# Altium PCB PCB.PcbDoc
Units mm, origin at the board's own origin, x right, y up, seen from the top; angles counter-clockwise.
Board outline 159.96 x 128.2 mm, 2 copper layers (Top Layer, Bottom Layer); 269 components, 251 nets, 1194 pads, 0 vias.
Unrouted connection lines stored in the file: 871.
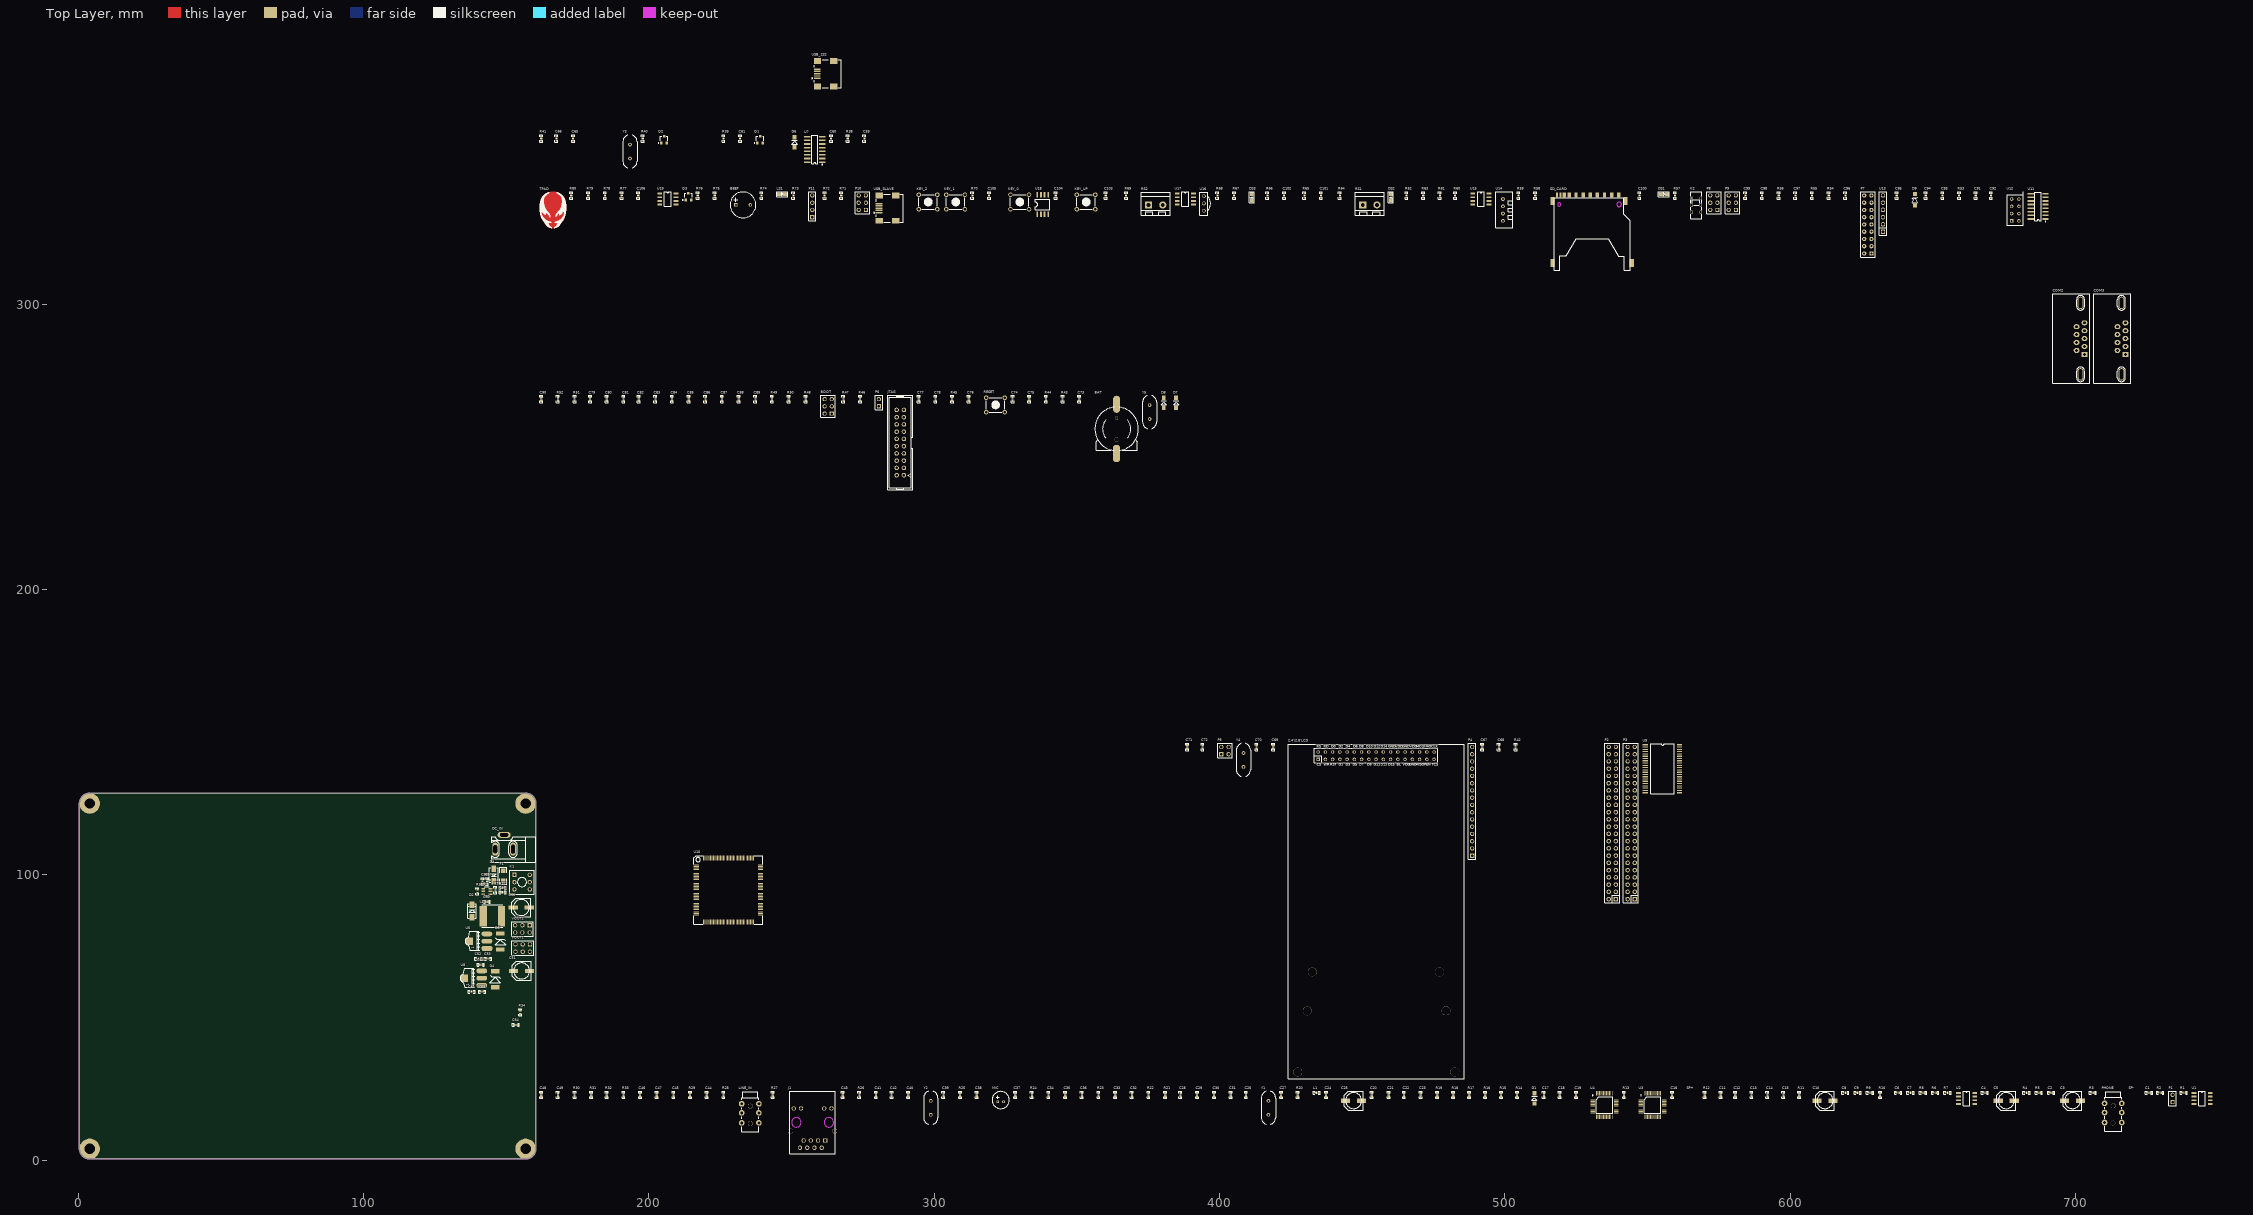
[diagram p0: Top Layer view]
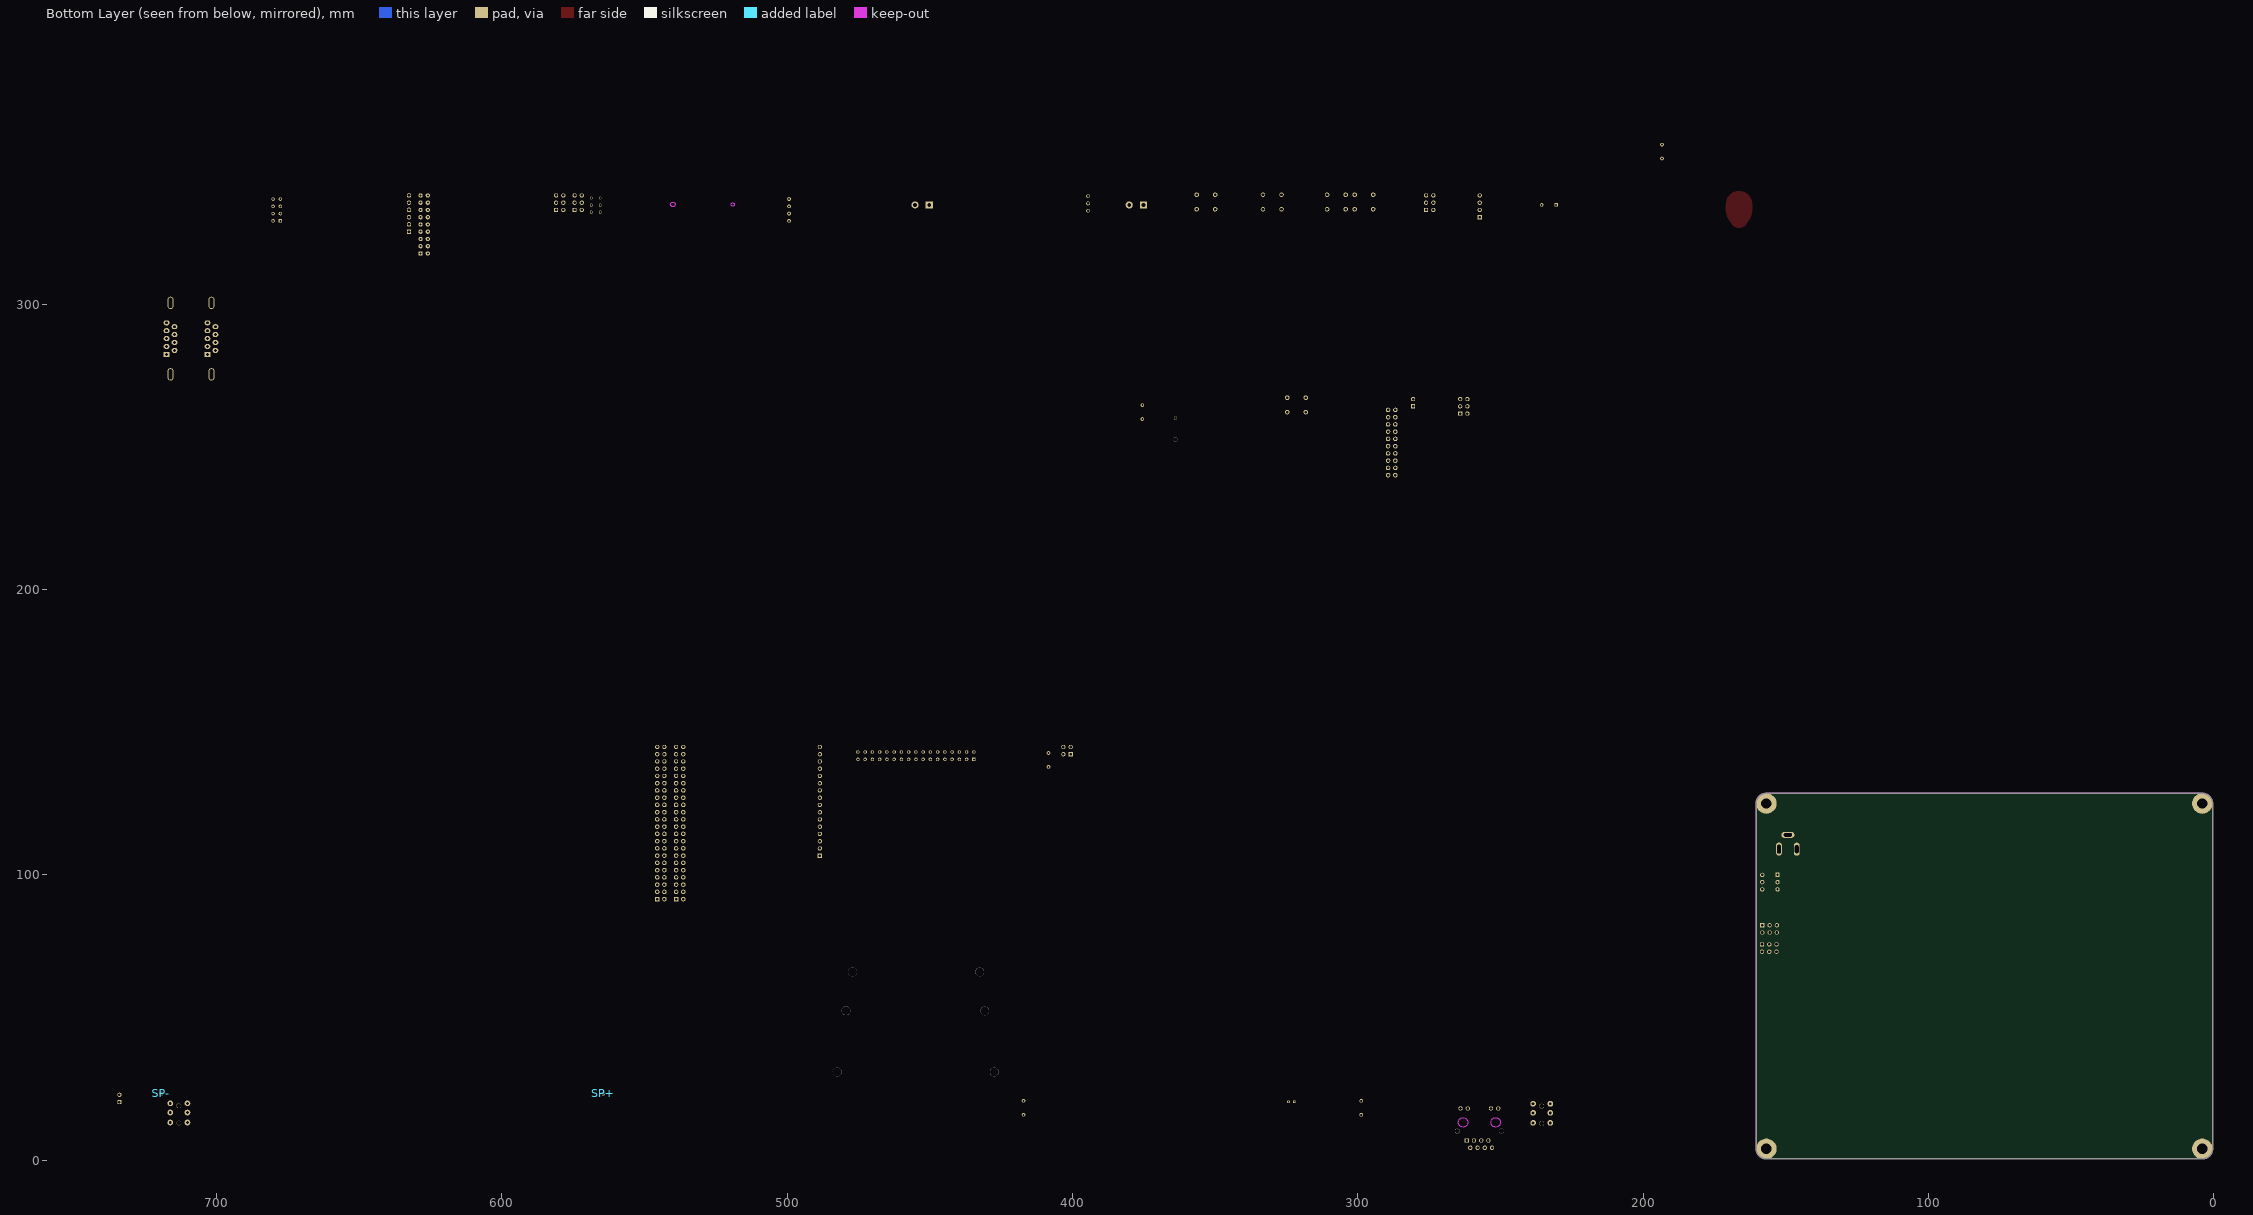
[diagram p1: Bottom Layer view, seen from below]

## Layer stack, top to bottom
Top Layer: signal copper 0.0356
Dielectric: dielectric 0.32, FR-4, Dk 4.8
Bottom Layer: signal copper 0.0356

## Board outline
4.064,0.381 cw(c4.064,3.981) 0.464,3.981 0.464,124.981 cw(c4.064,124.981) 4.064,128.581 156.824,128.581 cw(c156.824,124.981) 160.424,124.981 160.424,3.981 cw(c156.824,3.981) 156.824,0.381

## Design rules (kind name [scope] priority, off if disabled: settings)
Clearance [All] p1: gap=0.1
PolygonConnect [All] p1: connectstyle=Relief reliefconductorwidth=0.254 reliefentries=4 polygonreliefangle="90 Angle"
RoutingVias [All] p1: holewidth=0.711 width=1.27 viastyle="Through Hole" minholewidth=0.711 minwidth=1.27 maxholewidth=0.711 maxwidth=1.27
SilkscreenOverComponentPads [All] p1: minsilkscreentomaskgap=0.254
SolderMaskExpansion [All] p1: expansion=0.102
Width [All] p1: maxlimit=0.254 minlimit=0.254 preferedwidth=0.254
27 further rules are at their usual default settings.

## Classes and differential pairs
component class POWER&USB_UART: C50 C51 C52 C53 C54 C55 C56 C57 C58 C59 C60 C61 C62 C63 C64 C65 C66 D2 D3 D4 D5 D6 DC_IN F1 K1 L2 Q1 Q2 R34 R35 R36 R37 R38 R39 R40 R41 U5 U6 U7 U8 USB_232 VOUT1 VOUT2 Y3
component class DEVICES: BEEP C91 C92 C93 C94 C95 C96 C97 C98 C99 C100 C101 C102 C103 C104 C105 C106 COM2 COM3 D9 DS1 DS2 DS3 K2 KEY_0 KEY_1 KEY_2 KEY_UP LS1 P7 P8 P9 P10 P11 Q3 R53 R54 R55 R56 R57 R58 R59 R60 R61 R62 R63 R64 R65 R66 R67 R68 R69 R70 R71 R72 R73 R74 R75 R76 R77 R78 R79 R80 RS1 RS2 SD_CARD TPAD U11 U12 U13 U14 U15 U16 U17 U18 U19 USB_SLAVE
component class CORE: 2.4'/2.8'LCD BAT BOOT C67 C68 C69 C70 C71 C72 C73 C74 C75 C76 C77 C78 C79 C80 C81 C82 C83 C84 C85 C86 C87 C88 C89 C90 D7 D8 JTAG P2 P3 P4 P5 P6 R42 R43 R44 R45 R46 R47 R48 R49 R50 R51 R52 RESET U9 U10 Y4 Y5
component class AUDIO&ETHNET: C1 C2 C3 C4 C5 C6 C7 C8 C9 C10 C11 C12 C13 C14 C15 C16 C17 C18 C19 C20 C21 C22 C23 C24 C25 C26 C27 C28 C29 C30 C31 C32 C33 C34 C35 C36 C37 C38 C39 C40 C41 C42 C43 C44 C45 C46 C47 C48 C49 D1 J1 L1 LINE_IN MIC P1 PHONE R1 R2 R3 R4 R5 R6 R7 R8 R9 R10 R11 R12 R13 R14 R15 R16 R17 R18 R19 R20 R21 R22 R23 R24 R25 R26 R27 R28 R29 R30 R31 R32 R33 SP+ SP- U1 U2 U3 U4 Y1 Y2

## Components (designator, comment, footprint, x,y, rotation, side; value= is the part's Value field where it differs from the comment)
2.4'/2.8'LCD "TFT_LCD" db2*17-4.3 434.594,140.462 r0 top
BAT "BATT" BATM 363.982,256.286 r0 top
BEEP "BEEP" BELL-5 230.505,334.772 r0 top
BOOT "Header 3X2" HDR2X3 264.16,261.62 r90 top
C1 "1uF" 0603P 725.805,23.622 r0 top
C2 "1uF" 0603P 691.515,23.622 r0 top
C3 "220uF" CC6.56.5 699.008,20.828 r0 top
C4 "1uF" 0603P 668.274,23.622 r0 top
C5 "220uF" CC6.56.5 675.767,20.828 r0 top
C6 "102" 0603P 637.921,23.622 r0 top
C7 "101" 0603P 642.239,23.622 r0 top
C8 "10uF" 0603P 619.379,23.622 r0 top
C9 "104" 0603P 623.697,23.622 r0 top
C10 "220uF" CC6.56.5 612.267,20.828 r0 top
C11 "1uF" 0603P 575.691,22.86 r90 top
C12 "104" 0603P 580.771,22.86 r90 top
C13 "10uF" 0603P 586.486,22.86 r90 top
C14 "10uF" 0603P 592.074,22.86 r90 top
C15 "104" 0603P 597.662,22.86 r90 top
C16 "1uF" 0603P 558.673,22.86 r90 top
C17 "104" 0603P 513.715,22.86 r90 top
C18 "104" 0603P 519.303,22.86 r90 top
C19 "104" 0603P 525.018,22.86 r90 top
C20 "104" 0603P 453.39,22.86 r90 top
C21 "104" 0603P 459.359,22.86 r90 top
C22 "104" 0603P 464.693,22.86 r90 top
C23 "104" 0603P 470.535,22.86 r90 top
C24 "104" 0603P 437.388,22.86 r90 top
C25 "100uF" CC6.56.5 447.04,20.828 r0 top
C26 "22" 0603P 409.321,22.86 r90 top
C27 "22" 0603P 421.64,22.86 r90 top
C28 "104" 0603P 386.334,22.86 r90 top
C29 "104" 0603P 392.176,22.86 r90 top
C30 "104" 0603P 398.145,22.86 r90 top
C31 "10uF" 0603P 403.987,22.86 r90 top
C32 "10uF" 0603P 369.316,22.86 r90 top
C33 "10uF" 0603P 363.474,22.86 r90 top
C34 "104" 0603P 340.106,22.86 r90 top
C35 "104" 0603P 345.948,22.86 r90 top
C36 "104" 0603P 351.79,22.86 r90 top
C37 "1uF" 0603P 328.422,22.86 r90 top
C38 "1uF" 0603P 314.96,22.86 r90 top
C39 "101" 0603P 303.276,22.86 r90 top
C40 "1uF" 0603P 290.957,22.86 r90 top
C41 "22" 0603P 279.654,22.86 r90 top
C42 "22" 0603P 285.115,22.86 r90 top
C43 "104" 0603P 267.97,22.86 r90 top
C44 "1uF" 0603P 220.345,22.86 r90 top
C45 "1uF" 0603P 208.661,22.86 r90 top
C46 "104" 0603P 196.977,22.86 r90 top
C47 "104" 0603P 202.819,22.86 r90 top
C48 "104" 0603P 162.306,22.86 r90 top
C49 "104" 0603P 168.148,22.86 r90 top
C50 "103" 0603P 143.256,90.551 r180 top
C51 "220uF" CC6.56.5 155.448,66.294 r0 top
C52 "104" 0603P 140.335,70.612 r180 top
C53 "104" 0603P 143.637,70.612 r0 top
C54 "104" 0603P 153.416,47.371 r0 top
C55 "220uF" CC6.56.5 155.321,88.519 r0 top
C56 "104" 0603P 148.793,93.853 r0 top
C57 "104" 0603P 143.256,97.663 r90 top
C58 "10uF" 0603P 141.732,97.663 r90 top
C59 "104" 0603P 275.59,358.013 r90 top
C60 "10uF" 0603P 263.906,358.013 r90 top
C61 "104" 0603P 232.029,358.013 r90 top
C62 "10uF" 0603P 137.922,59.055 r180 top
C63 "104" 0603P 141.605,59.055 r180 top
C64 "104" 0603P 141.097,68.453 r0 top
C65 "22pF" 0603P 173.482,358.013 r90 top
C66 "22pF" 0603P 167.64,358.013 r90 top
C67 "104" 0603P 492.125,144.78 r90 top
C68 "104" 0603P 497.967,144.78 r90 top
C69 "104" 0603P 418.846,144.78 r90 top
C70 "104" 0603P 413.004,144.78 r90 top
C71 "10pF" 0603P 388.747,144.78 r90 top
C72 "10pF" 0603P 394.081,144.78 r90 top
C73 "104" 0603P 350.901,266.7 r90 top
C74 "22pF" 0603P 327.533,266.7 r90 top
C75 "22pF" 0603P 333.375,266.7 r90 top
C76 "104" 0603P 312.166,266.7 r90 top
C77 "10uF" 0603P 294.64,266.7 r90 top
C78 "104" 0603P 300.482,266.7 r90 top
C79 "104" 0603P 179.451,266.7 r90 top
C80 "104" 0603P 185.293,266.7 r90 top
C81 "104" 0603P 191.135,266.7 r90 top
C82 "104" 0603P 196.469,266.7 r90 top
C83 "104" 0603P 202.311,266.7 r90 top
C84 "104" 0603P 208.153,266.7 r90 top
C85 "104" 0603P 213.995,266.7 r90 top
C86 "104" 0603P 219.837,266.7 r90 top
C87 "104" 0603P 225.679,266.7 r90 top
C88 "104" 0603P 231.521,266.7 r90 top
C89 "104" 0603P 237.363,266.7 r90 top
C90 "104" 0603P 162.306,266.7 r90 top
C91 "104" 0603P 665.099,338.074 r90 top
C92 "104" 0603P 670.433,338.074 r90 top
C93 "104" 0603P 653.415,338.074 r90 top
C94 "104" 0603P 647.573,338.074 r90 top
C95 "104" 0603P 637.413,338.074 r90 top
C96 "104" 0603P 619.379,338.074 r90 top
C97 "104" 0603P 601.853,338.074 r90 top
C98 "104" 0603P 590.169,338.074 r90 top
C99 "104" 0603P 584.327,338.074 r90 top
C100 "104" 0603P 547.243,338.074 r90 top
C101 "104" 0603P 435.61,338.074 r90 top
C102 "104" 0603P 422.656,338.074 r90 top
C103 "104" 0603P 360.172,338.074 r90 top
C104 "104" 0603P 342.646,338.074 r90 top
C105 "104" 0603P 319.278,338.074 r90 top
C106 "104" 0603P 196.342,338.074 r90 top
COM2 "USART_F(母头)" DB9 703.199,287.909 r90 top
COM3 "USART_M(母头)" DB9 717.55,287.909 r90 top
D1 "1N4148" DIODE_SOP 510.413,19.812 r90 top
D2 "SS14" DIODE_3*5.3 138.049,87.376 r90 top
D3 "SS14" DIODE_3*5.3 145.669,99.822 r270 top
D4 "SMBJ5.0A" SMBJ 146.177,63.246 r90 top
D5 "SMBJ3.3A" SMBJ 147.955,76.454 r90 top
D6 "1N4148" DIODE_SOP 251.079,354.965 r90 top
D7 "1N4148" DIODE_SOP 384.81,263.652 r90 top
D8 "1N4148" DIODE_SOP 380.492,263.652 r90 top
D9 "ZMM3V3" DIODE_ZMMx 643.763,336.55 r90 top
DC_IN "POWER" DC10B 156.845,113.284 r180 top
DS1 "LED1" SMDLED 554.609,338.455 r0 top
DS2 "LED1" SMDLED 460.121,336.296 r90 top
DS3 "LED1" SMDLED 411.353,336.296 r90 top
F1 "1000mA" 1206 148.971,101.346 r270 top
J1 "RJ45" HR911105A 257.429,13.208 r0 top
JTAG "JTAG" JTAG_20 288.163,251.46 r90 top
K1 "BUTTON" BTN8.5*8.5 152.908,99.949 r0 top
K2 "MSS-22D18" MSS-22D18-DIP 565.531,337.185 r0 top
KEY_0 "KEY_M" KEY_M 326.771,338.328 r0 top
KEY_1 "KEY_M" KEY_M 304.292,338.328 r0 top
KEY_2 "KEY_M" KEY_M 294.64,338.328 r0 top
KEY_UP "KEY_M" KEY_M 350.012,338.328 r0 top
L1 "220R,2.0A,0.05DCR" 0603P 434.086,23.622 r0 top
L2 "4.7uH" L_SOP74 148.336,85.471 r180 top
LINE_IN "LINE_IN" PHONE_ST 235.585,16.383 r90 top
LS1 "LSENS" SMDLED 245.618,338.455 r0 top
MIC "MIC" MIC-6022 322.326,20.447 r0 top
P1 "Header 2" HDR1X2 734.06,20.32 r90 top
P2 "HEAD2*22" HEAD2*22 538.988,91.44 r90 top
P3 "HEAD2*22" HEAD2*22 545.592,91.44 r90 top
P4 "HEAD1*16" HDR1X16 488.569,106.68 r90 top
P5 "USART1" HDR2X2 400.685,142.24 r0 top
P6 "VREF_SEL" HDR1X2 280.67,264.16 r90 top
P7 "OV7670" HDR2X9 628.523,317.754 r90 top
P8 "RS232/RS485" HDR2X3 574.548,332.994 r90 top
P9 "RS232/BTCOM&GPS" HDR2X3 581.025,332.994 r90 top
P10 "USB/CAN" HDR2X3 276.098,332.994 r90 top
P11 "Header 4" HDR1X4 257.302,330.454 r90 top
PHONE "PHONE_M" PHONE_ST 713.232,16.51 r90 top
Q1 "S8050" SOT-23R 239.014,357.505 r0 top
Q2 "S8550" SOT-23R 205.359,357.505 r0 top
Q3 "S8050" SOT-23R 213.868,337.566 r0 top
R1 "10K" 0603P 737.997,23.622 r0 top
R2 "10K" 0603P 729.742,23.622 r0 top
R3 "10K" 0603P 706.12,23.622 r0 top
R4 "10K" 0603P 682.879,23.622 r0 top
R5 "10K" 0603P 687.197,23.622 r0 top
R6 "4.7K" 0603P 650.875,23.622 r0 top
R7 "47K" 0603P 655.193,23.622 r0 top
R8 "10K" 0603P 646.557,23.622 r0 top
R9 "10K" 0603P 628.015,23.622 r0 top
R10 "10R" 0603P 631.571,22.86 r90 top
R11 "10K" 0603P 603.25,22.86 r90 top
R12 "10K" 0603P 570.103,22.86 r90 top
R13 "10K" 0603P 541.782,22.86 r90 top
R14 "0R" 0603P 504.317,22.86 r90 top
R15 "6.8K" 0603P 498.729,22.86 r90 top
R16 "10K" 0603P 493.141,22.86 r90 top
R17 "10K" 0603P 487.553,22.86 r90 top
R18 "10K" 0603P 481.965,22.86 r90 top
R19 "100K" 0603P 476.377,22.86 r90 top
R20 "1M" 0603P 427.482,22.86 r90 top
R21 "100K" 0603P 381,22.86 r90 top
R22 "1K" 0603P 375.158,22.86 r90 top
R23 "1K" 0603P 357.632,22.86 r90 top
R24 "510R" 0603P 334.264,22.86 r90 top
R25 "510R" 0603P 309.118,22.86 r90 top
R26 "1K" 0603P 273.812,22.86 r90 top
R27 "1K" 0603P 243.459,22.86 r90 top
R28 "510R" 0603P 226.187,22.86 r90 top
R29 "510R" 0603P 214.503,22.86 r90 top
R30 "49.9R" 0603P 173.99,22.86 r90 top
R31 "49.9R" 0603P 179.832,22.86 r90 top
R32 "49.9R" 0603P 185.293,22.86 r90 top
R33 "49.9R" 0603P 191.135,22.86 r90 top
R34 "10R" 0603P 154.94,51.816 r90 top
R35 "9.53K" 0603P 146.253,94.615 r270 top
R36 "100K" 0603P 139.954,94.234 r90 top
R37 "49.9K" 0603P 148.793,95.377 r180 top
R38 "10K" 0603P 269.748,358.013 r90 top
R39 "1K" 0603P 226.187,358.013 r90 top
R40 "1K" 0603P 197.866,358.013 r90 top
R41 "1K" 0603P 162.306,358.013 r90 top
R42 "10K" 0603P 503.809,144.78 r90 top
R43 "1M" 0603P 345.059,266.7 r90 top
R44 "10K" 0603P 339.217,266.7 r90 top
R45 "10K" 0603P 306.324,266.7 r90 top
R46 "10K" 0603P 274.066,266.7 r90 top
R47 "10K" 0603P 268.224,266.7 r90 top
R48 "10K" 0603P 255.016,266.7 r90 top
R49 "10K" 0603P 243.205,266.7 r90 top
R50 "10K" 0603P 249.047,266.7 r90 top
R51 "10K" 0603P 173.99,266.7 r90 top
R52 "10K" 0603P 168.148,266.7 r90 top
R53 "510R" 0603P 659.257,338.074 r90 top
R54 "10R" 0603P 613.537,338.074 r90 top
R55 "1K" 0603P 607.695,338.074 r90 top
R56 "510R" 0603P 596.011,338.074 r90 top
R57 "510R" 0603P 559.689,338.074 r90 top
R58 "360R" 0603P 510.667,338.074 r90 top
R59 "47K" 0603P 504.825,338.074 r90 top
R60 "360R" 0603P 482.6,338.074 r90 top
R61 "47K" 0603P 477.266,338.074 r90 top
R62 "510R" 0603P 465.582,338.074 r90 top
R63 "47K" 0603P 471.424,338.074 r90 top
R64 "120R" 0603P 442.214,338.074 r90 top
R65 "4.7K" 0603P 429.768,338.074 r90 top
R66 "510R" 0603P 416.814,338.074 r90 top
R67 "47K" 0603P 405.13,338.074 r90 top
R68 "47K" 0603P 399.288,338.074 r90 top
R69 "120R" 0603P 367.284,338.074 r90 top
R70 "4.7K" 0603P 313.436,338.074 r90 top
R71 "10R" 0603P 267.462,338.074 r90 top
R72 "10R" 0603P 261.62,338.074 r90 top
R73 "1.5K" 0603P 250.698,338.074 r90 top
R74 "47K" 0603P 239.522,338.074 r90 top
R75 "1K" 0603P 223.139,338.074 r90 top
R76 "1K" 0603P 217.17,338.074 r90 top
R77 "10K" 0603P 190.5,338.074 r90 top
R78 "4.7K" 0603P 184.658,338.074 r90 top
R79 "4.7K" 0603P 178.816,338.074 r90 top
R80 "1M" 0603P 172.847,338.074 r90 top
RESET "KEY_M" KEY_M 318.262,267.208 r0 top
RS1 "RS485" HEAD2L-0.8 450.215,334.772 r0 top
RS2 "RS485" HEAD2L-0.8 375.158,334.772 r0 top
SD_CARD "sd card" SDCARD_L 537.464,338.201 r0 top
SP+ "SPK+" TP-1.5 564.515,23.368 r90 top
SP- "SPK-" TP-1.5 719.455,23.368 r90 top
TPAD "ALIENTEK" ALIENTEK_PAD1 166.37,339.344 r0 top
U1 "TDA1308T" SOP-8 741.553,23.495 r0 top
U2 "HT6872" SOP-8 659.003,23.495 r0 top
U3 "DM9000" mTQFP48 551.942,20.701 r0 top
U4 "VS1053B" mTQFP48 535.051,20.701 r0 top
U5 "AMS1117-3.3" AMS1117 143.256,74.168 r90 top
U6 "MP2359" SOT-23-6 144.526,93.218 r180 top
U7 "CH340G" SOP16M 258.191,354.203 r90 top
U8 "AMS1117-1.8" AMS1117 141.478,61.214 r90 top
U9 "IS62WV51216" TSOP44 549.275,145.542 r0 top
U10 "STM32F103ZET6" LQFP144 216.662,103.378 r0 top
U11 "SP3232" SOP16M 686.943,334.264 r90 top
U12 "WIRELESS" NRF24L01 680.212,329.184 r0 top
U13 "ATK MODULE" HEAD6 632.587,325.374 r90 top
U14 "DHT11&DS18B20" DHT11 499.364,329.184 r90 top
U15 "SP3485" SOP-8 488.823,338.709 r0 top
U16 "HS0038" HS0038 394.589,332.74 r90 top
U17 "TJA1050" SOP-8 385.191,338.709 r0 top
U18 "W25Q128" SOIC-8 336.169,331.47 r90 top
U19 "24C02" SOP-8 203.835,338.709 r0 top
USB_232 "USB" USB/SM0.8-6H5 266.827,380.746 r0 top
USB_SLAVE "USB" USB/SM0.8-6H5 288.544,333.629 r0 top
VOUT1 "VCC3.3" HDR2X3 158.369,75.565 r180 top
VOUT2 "VCC5" HDR2X3 158.242,82.296 r180 top
Y1 "12.288MHz" XTAL_US 417.195,15.875 r90 top
Y2 "25MHz" XTAL_US 298.831,15.875 r90 top
Y3 "12MHz" XTAL_US 193.421,351.028 r90 top
Y4 "32.768K" XTAL_US 408.432,137.795 r90 top
Y5 "8M" XTAL_US 375.539,259.715 r90 top

## Footprints (in the part's own frame and the unit in brackets; to place one, negate y for a bottom-side part, rotate by r counter-clockwise, add the part's x,y. Pads: shape width x height; smd on the part's side, far side on the other; paste and mask are expansions set on the pad)
0603P [mil]
  rect 30x30 smd: 1(-27,0) 2(27.5,-0.06)
  silkscreen extent -50,-20 50,20
1206 [mil]
  rect 60x60 smd: 1(0,0) 2(135,0)
  silkscreen extent -50,-50 185,50
ALIENTEK_PAD1 [mm]
  Top Layer drawing of 922 lines, arcs and shapes, not listed
  silkscreen extent -4.6,-12.53 4.68,-0.13
AMS1117 [mil]
  oct 65x150 smd: 1(0.03,-0.06)
  oval 65x150 smd: 2(100.03,-0.06) 3(200.03,-0.06)
  rect 100x100 smd: 4(100.03,239.94)
  silkscreen extent -26,100 234,293
BATM [mm]
  round 1.1 hole 1.1 unplated: 0(0,3.748)
  round 1.5 hole 1.5 unplated: 0(0.025,-3.752)
  oct 2.5x6 smd: 1(0,-8.602)
  oval 2.5x6 smd: 2(0,8.598)
  silkscreen extent -7.62,-7.58 7.62,7.57
BELL-5 [mm]
  rect 1.2x1.2 hole 0.7: 1(0,0)
  round 1.2 hole 0.7: 2(5.08,0)
  silkscreen extent -1.97,-4.51 7.05,4.51
BTN8.5*8.5 [mm]
  rect 1.5x1.5 hole 0.8: 1(0,0)
  round 1.5 hole 0.8: 2(0,-2.54) 3(0,-5.08) 4(5.4,-5.08) 5(5.4,-2.54) 6(5.4,0)
  silkscreen extent -1.55,-6.79 6.95,1.71
CC6.56.5 [mm]
  rect 3.2x1.5 smd: 1(-2.794,0) 2(2.8,0)
  silkscreen extent -3.3,-3.3 3.3,3.3
db2*17-4.3 [mm]
  rect 1.2x1.2 hole 0.7: 1(-0.002,0.006)
  round 1.2 hole 0.7: 2(-0.002,2.546) 3(2.538,0.006) 4(2.538,2.546) 5(5.08,0) 6(5.078,2.546) 7(7.62,0) 8(7.62,2.54) 9(10.158,0.006) 10(10.158,2.546) 11(12.698,0.006) 12(12.698,2.546) 13(15.238,0.006) 14(15.238,2.546) 15(17.778,0.006) 16(17.778,2.546) 17(20.318,0.006) 18(20.318,2.546) 19(22.858,0.006) 20(22.858,2.546) 21(25.398,0.006) 22(25.398,2.546) 23(27.938,0.006) 24(27.938,2.546) 25(30.478,0.006) 26(30.478,2.546) 27(33.018,0.006) 28(33.018,2.546) 29(35.558,0.006) 30(35.558,2.546) 31(38.098,0.006) 32(38.098,2.546) 33(40.638,0.006) 34(40.638,2.546)
  round 3.1 hole 3.1: ""(-7.125,-109.596) ""(-3.81,-88.18) ""(-2.037,-74.525) ""(42.54,-74.525) ""(44.82,-88.12) ""(47.925,-109.596)
  silkscreen extent -10.4,-111.89 51.19,5.33
DB9 [mil]
  oval 170x80 hole 50 slot 140 at 0 deg: 0(-493,55) 0(493,55)
  rect 70x80 hole 38: 1(-218,0)
  oval 70x80 hole 38: 2(-109,0) 3(0,0) 4(109,0) 5(218,0) 6(-163,110) 7(-54,110) 8(55,110) 9(164,110)
  silkscreen extent -618,-70 618,440
DC10B [mil]
  oval 80x180 hole 50 slot 110 at 90 deg: 1(419.09,170)
  oval 80x180 hole 50 slot 120 at 90 deg: 2(175,170)
  oval 180x80 hole 50 slot 110 at 0 deg: 3(297.05,-26.85)
  silkscreen extent -138,0 465,350
DHT11 [mm]
  round 1.3 hole 0.7: 1(0,0) 2(2.54,0) 3(5.08,0) 4(7.62,0)
  silkscreen extent -2.5,-3.5 10.12,2.5
DIODE_3*5.3 [mm]
  rect 2.3x1.75 smd: 1(-2.286,0) 2(2.159,0)
  silkscreen extent -2.67,-1.5 2.54,1.5
DIODE_SOP [mm]
  rect 1.5x1.3 smd: 1(0,0) 2(3.556,0)
  silkscreen extent 1.14,-1.02 2.56,1.02
DIODE_ZMMx [mm]
  rect 1.5x1.3 smd: 1(-2.032,0) 2(2.032,0)
  silkscreen extent -1.02,-0.95 0.95,0.95
HDR1X2 [mm]
  rect 1.5x1.5 hole 0.9: 1(0,0)
  round 1.5 hole 0.9: 2(2.54,0)
  silkscreen extent -1.27,-1.27 3.81,1.27
HDR1X4 [mm]
  rect 1.5x1.5 hole 0.889: 1(0,0)
  round 1.5 hole 0.889: 2(2.54,0) 3(5.08,0) 4(7.62,0)
  silkscreen extent -1.27,-1.27 8.89,1.27
HDR1X16 [mm]
  rect 1.5x1.5 hole 0.9: 1(0,0)
  round 1.5 hole 0.9: 2(2.54,0) 3(5.08,0) 4(7.62,0) 5(10.16,0) 6(12.7,0) 7(15.24,0) 8(17.78,0) 9(20.32,0) 10(22.86,0) 11(25.4,0) 12(27.94,0) 13(30.48,0) 14(33.02,0) 15(35.56,0) 16(38.1,0)
  silkscreen extent -1.27,-1.27 39.37,1.27
HDR2X2 [mm]
  rect 1.5x1.5 hole 0.9: 1(0,0)
  round 1.5 hole 0.9: 2(0,2.54) 3(2.54,0) 4(2.54,2.54)
  silkscreen extent -1.27,-1.27 3.81,3.81
HDR2X3 [mm]
  rect 1.5x1.5 hole 0.9: 1(0,0)
  round 1.5 hole 0.9: 2(0,2.54) 3(2.54,0) 4(2.54,2.54) 5(5.08,0) 6(5.08,2.54)
  silkscreen extent -1.27,-1.27 6.35,3.81
HDR2X9 [mm]
  rect 1.5x1.5 hole 0.7: 1(0,0)
  round 1.5 hole 0.7: 2(0,2.54) 3(2.54,0) 4(2.54,2.54) 5(5.08,0) 6(5.08,2.54) 7(7.62,0) 8(7.62,2.54) 9(10.16,0) 10(10.16,2.54) 11(12.7,0) 12(12.7,2.54) 13(15.24,0) 14(15.24,2.54) 15(17.78,0) 16(17.78,2.54) 17(20.32,0) 18(20.32,2.54)
  silkscreen extent -1.27,-1.27 21.59,3.81
HEAD2*22 [mil]
  rect 62x62 hole 35: 1(0.43,0.42)
  round 62 hole 35: 2(0.43,100.42) 3(100.43,0.42) 4(100.43,100.42) 5(200.43,0.42) 6(200.43,100.42) 7(300.43,0.42) 8(300.43,100.42) 9(400.43,0.42) 10(400.43,100.42) 11(500.43,0.42) 12(500.43,100.42) 13(600.43,0.42) 14(600.43,100.42) 15(700.43,0.42) 16(700.43,100.42) 17(800.43,0.42) 18(800.43,100.42) 19(900.43,0.42) 20(900.43,100.42) 21(1000.43,0.42) 22(1000.43,100.42) 23(1100.43,0.42) 24(1100.43,100.42) 25(1200.43,0.42) 26(1200.43,100.42) 27(1300.43,0.42) 28(1300.43,100.42) 29(1400.43,0.42) 30(1400.43,100.42) 31(1500.43,0.42) 32(1500.43,100.42) 33(1600.43,0.42) 34(1600.43,100.42)
  round 60 hole 35: 35(1700,0) 36(1700,100) 37(1800,0) 38(1800,100) 39(1900,0) 40(1900,100) 41(2000,0) 42(2000,100) 43(2100,0) 44(2100,100)
  silkscreen extent -50,-50 2150,157
HEAD2L-0.8 [mm]
  rect 2.5x2.5 hole 1.35: 1(0,0)
  round 2.5 hole 1.35: 2(5,0)
  silkscreen extent -2.54,-3.56 7.62,4.44
HEAD6 [mil]
  rect 62x62 hole 35: 1(0.43,0.42)
  round 62 hole 35: 2(100.43,0.42) 3(200.43,0.42) 4(300.43,0.42) 5(400.43,0.42) 6(500.43,0.42)
  silkscreen extent -50,-50 550,51
HR911105A [mil]
  rect 60x60 hole 35: 1(175.2,-250)
  round 60 hole 35: 2(125.2,-350) 3(75.2,-250) 4(25.2,-350) 5(-24.8,-250) 6(-74.8,-350) 7(-124.8,-250) 8(-174.8,-350)
  round 59.06 hole 40.16: 9(259.84,192.91) 12(-259.84,192.91)
  round 59.05 hole 40.16: 10(160,192.91) 11(-160,192.91)
  round 66.93 hole 64.96: 13(305.12,-120) 14(-305.12,-120)
  Keep-Out Layer circle w2: c225.04,0 r64.96
  Keep-Out Layer circle w2: c-224.96,0 r64.96
  silkscreen extent -315,-430 315,430
HS0038 [mm]
  round 1.3 hole 0.889: 1(0,0) 2(2.54,0) 3(5.08,0)
  silkscreen extent -1.65,-2.32 6.48,1.4
JTAG_20 [mil]
  round 62 hole 35: 1(-450,-50) 2(-450,50) 3(-350,-50) 4(-350,50) 5(-250,-50) 6(-250,50) 7(-150,-50) 8(-150,50) 9(-50,-50) 10(-50,50) 11(50,-50) 12(50,50) 13(150,-50) 14(150,50) 15(250,-50) 16(250,50) 17(350,-50) 18(350,50) 19(450,-50) 20(450,50)
  silkscreen extent -650,-175 650,175
KEY_M [mil]
  round 62 hole 38: 1(0,0) 1(255.91,0) 2(0,-200) 2(255.91,-200)
  silkscreen extent 0,-200 255,0
L_SOP74 [mm]
  rect 2.5x7.2 smd: 1(0,0) 2(6.35,0)
  silkscreen extent -0.51,-3.94 6.89,3.94
LQFP144 [mm]
  rect 1.8x0.254 smd: 1(-0.009,0.001) 2(-0.009,-0.499) 3(-0.009,-0.999) 4(-0.009,-1.499) 5(-0.009,-1.999) 6(-0.009,-2.499) 7(-0.009,-2.999) 8(-0.009,-3.499) 9(-0.009,-3.999) 10(-0.009,-4.499) 11(-0.009,-4.999) 12(-0.009,-5.499) 13(-0.009,-5.999) 14(-0.009,-6.499) 15(-0.009,-6.999) 16(-0.009,-7.499) 17(-0.009,-7.999) 18(-0.009,-8.499) 19(-0.009,-8.999) 20(-0.009,-9.499) 21(-0.009,-9.999) 22(-0.009,-10.499) 23(-0.009,-10.999) 24(-0.009,-11.499) 25(-0.009,-11.999) 26(-0.009,-12.499) 27(-0.009,-12.999) 28(-0.009,-13.499) 29(-0.009,-13.999) 30(-0.009,-14.499) 31(-0.009,-14.999) 32(-0.009,-15.499) 33(-0.009,-15.999) 34(-0.009,-16.499) 35(-0.009,-16.999) 36(-0.009,-17.499) 73(22.491,-17.499) 74(22.491,-16.999) 75(22.491,-16.499) 76(22.491,-15.999) 77(22.491,-15.499) 78(22.491,-14.999) 79(22.491,-14.499) 80(22.491,-13.999) 81(22.491,-13.499) 82(22.491,-12.999) 83(22.491,-12.499) 84(22.491,-11.999) 85(22.491,-11.499) 86(22.491,-10.999) 87(22.491,-10.499) 88(22.491,-9.999) 89(22.491,-9.499) 90(22.491,-8.999) 91(22.491,-8.499) 92(22.491,-7.999) 93(22.491,-7.499) 94(22.491,-6.999) 95(22.491,-6.499) 96(22.491,-5.999) 97(22.491,-5.499) 98(22.491,-4.999) 99(22.491,-4.499) 100(22.491,-3.999) 101(22.491,-3.499) 102(22.491,-2.999) 103(22.491,-2.499) 104(22.491,-1.999) 105(22.491,-1.499) 106(22.491,-0.999) 107(22.491,-0.499) 108(22.491,0.001)
  rect 0.254x1.8 smd: 37(2.491,-19.999) 38(2.991,-19.999) 39(3.491,-19.999) 40(3.991,-19.999) 41(4.491,-19.999) 42(4.991,-19.999) 43(5.491,-19.999) 44(5.991,-19.999) 45(6.491,-19.999) 46(6.991,-19.999) 47(7.491,-19.999) 48(7.991,-19.999) 49(8.491,-19.999) 50(8.991,-19.999) 51(9.491,-19.999) 52(9.991,-19.999) 53(10.491,-19.999) 54(10.991,-19.999) 55(11.491,-19.999) 56(11.991,-19.999) 57(12.491,-19.999) 58(12.991,-19.999) 59(13.491,-19.999) 60(13.991,-19.999) 61(14.491,-19.999) 62(14.991,-19.999) 63(15.491,-19.999) 64(15.991,-19.999) 65(16.491,-19.999) 66(16.991,-19.999) 67(17.491,-19.999) 68(17.991,-19.999) 69(18.491,-19.999) 70(18.991,-19.999) 71(19.491,-19.999) 72(19.991,-19.999) 109(19.991,2.501) 110(19.491,2.501) 111(18.991,2.501) 112(18.491,2.501) 113(17.991,2.501) 114(17.491,2.501) 115(16.991,2.501) 116(16.491,2.501) 117(15.991,2.501) 118(15.491,2.501) 119(14.991,2.501) 120(14.491,2.501) 121(13.991,2.501) 122(13.491,2.501) 123(12.991,2.501) 124(12.491,2.501) 125(11.991,2.501) 126(11.491,2.501) 127(10.991,2.501) 128(10.491,2.501) 129(9.991,2.501) 130(9.491,2.501) 131(8.991,2.501) 132(8.491,2.501) 133(7.991,2.501) 134(7.491,2.501) 135(6.991,2.501) 136(6.491,2.501) 137(5.991,2.501) 138(5.491,2.501) 139(4.991,2.501) 140(4.491,2.501) 141(3.991,2.501) 142(3.491,2.501) 143(2.991,2.501) 144(2.491,2.501)
  silkscreen extent -0.81,-20.8 23.29,3.3
MIC-6022 [mm]
  rect 1x1 hole 0.5: 1(0,0)
  round 1 hole 0.5: 2(2,0)
  silkscreen extent -1.98,-2.41 4.01,3.58
MSS-22D18-DIP [mm]
  oct 1x1.2 hole 0.5 slot 0.8 at 90 deg: 1(0,0) 2(3.175,0) 3(0,-2.5) 4(3.175,-2.5) 5(0,-5) 6(3.175,-5)
  silkscreen extent -0.38,-7.24 3.56,2.16
mTQFP48 [mm]
  rect 1.6x0.254 smd: 1(-4.223,1.3) 2(-4.223,0.8) 3(-4.223,0.3) 4(-4.223,-0.2) 5(-4.223,-0.7) 6(-4.223,-1.2) 7(-4.223,-1.7) 8(-4.223,-2.2) 9(-4.223,-2.7) 10(-4.223,-3.2) 11(-4.223,-3.7) 12(-4.223,-4.2) 25(3.977,-4.2) 26(3.977,-3.7) 27(3.977,-3.2) 28(3.977,-2.7) 29(3.977,-2.2) 30(3.977,-1.7) 31(3.977,-1.2) 32(3.977,-0.7) 33(3.977,-0.2) 34(3.977,0.3) 35(3.977,0.8) 36(3.977,1.3)
  rect 0.254x1.6 smd: 13(-2.873,-5.55) 14(-2.373,-5.55) 15(-1.873,-5.55) 16(-1.373,-5.55) 17(-0.873,-5.55) 18(-0.373,-5.55) 19(0.127,-5.55) 20(0.627,-5.55) 21(1.127,-5.55) 22(1.627,-5.55) 23(2.127,-5.55) 24(2.627,-5.55) 37(2.627,2.65) 38(2.127,2.65) 39(1.627,2.65) 40(1.127,2.65) 41(0.627,2.65) 42(0.127,2.65) 43(-0.373,2.65) 44(-0.873,2.65) 45(-1.373,2.65) 46(-1.873,2.65) 47(-2.373,2.65) 48(-2.873,2.65)
  silkscreen extent -4.35,-4.35 2.78,2.12
NRF24L01 [mm]
  round 1.2 hole 0.7: 1(0,0) 3(0,2.54) 4(-2.54,2.54) 5(0,5.08) 6(-2.54,5.08) 7(0,7.62) 8(-2.54,7.62)
  rect 1.2x1.2 hole 0.7: 2(-2.54,0)
  silkscreen extent -4.32,-1.5 1.5,10.16
PHONE_ST [mm]
  round 1.676 hole 1.676: 0(-3.556,0) 0(2.54,0)
  round 2 hole 1: 1(-3.35,-3) 1(-3.35,3) 2(0.15,3) 2(0.15,-3) 3(3.35,-3) 3(3.35,3)
  silkscreen extent -6.39,-3.01 7.49,3
SDCARD_L [mm]
  rect 1.2x1.8 smd: 1(0,0) 2(-2.489,0) 3(-4.983,-0.009) 4(-7.483,-0.009) 5(-9.983,-0.009) 6(-12.483,-0.009) 7(-14.908,-0.009) 9(2.517,-0.009)
  rect 1.1x1.8 smd: 8(-16.612,0)
  rect 0.7x1.8 smd: 10(-17.908,-0.009) 12(-19.101,0)
  rect 1.5x2.8 smd: 11(-20.726,-23.834) 11(-20.726,-2.143) 11(4.826,-2.143) 11(7.01,-23.784)
  Keep-Out Layer circle w0.254: c-18.39,-3.3 r0.58
  Keep-Out Layer circle w0.254: c2.642,-3.26 r0.82
  silkscreen extent -20.13,-26.3 6.44,-0.9
SMBJ [mm]
  rect 1.5x3 smd: 1(-2.667,0) 2(2.921,0)
  silkscreen extent -1.02,-1.85 1.52,1.83
SMDLED [mm]
  rect 1.4x1.27 smd: 1(0.001,-0.002) 2(2.211,-0.002)
  silkscreen extent -0.8,-0.89 3.01,0.89
SOIC-8 [mil]
  rect 80x24 smd: 1(0,0) 2(0,-50.06) 3(0,-100.06) 4(0,-150.06) 5(270,-150) 6(270,-100) 7(270,-50) 8(270,0)
  silkscreen extent 65,-175 205,25
SOP16M [mm]
  rect 0.6x2.2 smd: 1(-4.445,-2.6) 2(-3.175,-2.6) 3(-1.905,-2.6) 4(-0.635,-2.6) 5(0.635,-2.6) 6(1.905,-2.6) 7(3.175,-2.6) 8(4.445,-2.6) 9(4.445,2.6) 10(3.175,2.6) 11(1.905,2.6) 12(0.635,2.6) 13(-0.635,2.6) 14(-1.905,2.6) 15(-3.175,2.6) 16(-4.445,2.6)
  silkscreen extent -5.42,-2.72 5,1.1
SOP-8 [mil]
  rect 65x25 smd: 1(0,0) 2(0,-50) 3(0,-100) 4(0,-150) 5(224.41,-150) 6(224.41,-100) 7(224.41,-50) 8(224.41,0)
  silkscreen extent 65,-175 159,25
SOT-23-6 [mil]
  rect 50x20 smd: 1(0,0) 2(0,-37.4) 3(0,-74.8) 4(100,-74.8) 5(100,-37.4) 6(100,0)
  silkscreen extent 0,-99 80,35
SOT-23R [mm]
  rect 0.9x0.95 smd: 1(0.95,-1.048) 2(-0.95,-1.048) 3(0,1.302)
  silkscreen extent -2.07,-1.17 1.3,1.3
TP-1.5 [mm]
  round 1.5 smd far side: 1(0,0)
TSOP44 [mm]
  rect 1.8x0.4 smd: 1(-0.009,0.001) 2(-0.009,-0.799) 3(-0.009,-1.599) 4(-0.009,-2.399) 5(-0.009,-3.199) 6(-0.009,-3.999) 7(-0.009,-4.799) 8(-0.009,-5.599) 9(-0.009,-6.399) 10(-0.009,-7.199) 11(-0.009,-7.999) 12(-0.009,-8.799) 13(-0.009,-9.599) 14(-0.009,-10.399) 15(-0.009,-11.199) 16(-0.009,-11.999) 17(-0.009,-12.799) 18(-0.009,-13.599) 19(-0.009,-14.399) 20(-0.009,-15.199) 21(-0.009,-15.999) 22(-0.009,-16.799) 23(11.991,-16.799) 24(11.991,-15.999) 25(11.991,-15.199) 26(11.991,-14.399) 27(11.991,-13.599) 28(11.991,-12.799) 29(11.991,-11.999) 30(11.991,-11.199) 31(11.991,-10.399) 32(11.991,-9.599) 33(11.991,-8.799) 34(11.991,-7.999) 35(11.991,-7.199) 36(11.991,-6.399) 37(11.991,-5.599) 38(11.991,-4.799) 39(11.991,-3.999) 40(11.991,-3.199) 41(11.991,-2.399) 42(11.991,-1.599) 43(11.991,-0.799) 44(11.991,0.001)
  silkscreen extent 1.83,-17.2 10.16,0.4
USB/SM0.8-6H5 [mm]
  rect 2.3x0.5 smd: 1(-7.85,-1.6) 2(-7.85,-0.8) 3(-7.85,0) 4(-7.85,0.8) 5(-7.85,1.6)
  rect 2.5x2 smd: 6(-7.75,4.45) 7(-1.996,4.45) 8(-7.75,-4.45) 9(-1.996,-4.45)
  round 0.6 hole 1.27 unplated: MH1(-5.25,2.2) MH2(-5.25,-2.2)
  silkscreen extent -9.67,-4.95 0.7,4.95
XTAL_US [mil]
  round 50 hole 28: 1(0,0) 2(192.13,0)
  silkscreen extent -131,-98 323,98

## Part data
2.4'/2.8'LCD: library part TF
BOOT: "Header, 3-Pin, Dua"
D4 D5: library part SMBJ
D9: library part ZMM3V6, "Z"
DS1 DS2 DS3: library part LED2, "Typical RED, GREEN, YELLOW, AMBER GaA"
J1: library part HR9
K1: library part B
K2: "Á"
LINE_IN PHONE: library part PH
LS1: "LIGHT"
P1 P11: "Header,"
P2 P3: library part HEA
P4: library part "Header 16", "Header, 1"
P5: library part "Header 2X2", "Header, 2-Pin, Dua"
P6: library part "Header 2", "Header,"
P7: library part "Header 9X2", "Header, 9-Pin, Dua"
P8 P9 P10 VOUT1 VOUT2: library part "Header 3X2", "Header, 3-Pin, Dua"
Q1 Q3: library part NPN, "8050/BCW846/B"
Q2: library part PNP, "8550/"
SD_CARD: library part sd
SP+ SP-: library part TEST-POINT
TPAD: library part ALI
U1: library part TD
U2: library part HT6871, "H"
U3: library part DM
U4: library part V
U5 U8: library part AM
U6: "DC DC Step Do"
U7: "USB"
U9: library part IS61LV
U10: "STM32F10"
U11 U15: library part MA
U12: library part NRF
U13: library part ATK-HC05, "ATK"
U14: library part DHT11, "Êý×"
U16: library part H
U17: library part SN65HV
U18: library part W25X16, "W25X16;SST25VF016;MX25"
U19: library part 2
Y1 Y2 Y3 Y4 Y5: library part XTAL, "Crystal Oscil"

## Free pads (board coordinates)
  round 7.2 hole 3.6: 0(4.064,3.937) 0(4.064,124.968) 0(156.845,3.937) 0(156.845,124.968)

## Nets (pads, with @x,y where several pads share a name; then routed paths per layer and width w, separated by ;. In a path a pad name is that pad's centre, name@x,y a point inside that pad or via, vN(x,y) a via of type N, cw(c..) or ccw(c..) an arc to the next point about the centre after c; other vN are vias at no path point)
1WIRE_DQ: P3.12 R65.1 U10.126 U14.2
AREF: C13.2 C14.2 R9.2 R11.2 U1.3 U1.5
AVDD: C34.1 C35.1 C36.1 C54.2 R22.1 R34.1 U4.38 U4.43 U4.45
BEEP: P3.2 R76.2 U10.139
BOOT0: R41.2 R49.1 U10.138
BOOT1: 2.4'/2.8'LCD.29 P2.33 R50.2 U10.48
CAN_RX: P10.2 U17.4
CAN_TX: P10.1 U17.1
CH430_D+: U7.5 USB_232.3
CH430_D-: U7.6 USB_232.2
COM_RX: COM3.4 K2.4
COM_TX: COM3.3 K2.3
CVDD: C20.1 C21.1 C22.1 C23.1 C62.2 C63.2 U4.5 U4.7 U4.24 U4.31 U8.2 U8.4
DM9000_INT: D1.1 P3.34 R55.1 U10.91
DM9000_RST: P3.15 R13.2 U3.40 U10.123 U15.2 U15.3
F_CS: P2.44 U10.73 U18.1
FIFO_OE: P3.8 P7.7 U10.132
FIFO_RCLK: JTAG.3 P3.6 P7.16 R46.2 U10.134
FIFO_RRST: P3.9 P7.5 U10.129
FIFO_WEN: JTAG.13 P3.7 P7.18 R51.2 U10.133
FIFO_WRST: P3.16 P7.3 U10.122
FSMC_A0: 2.4'/2.8'LCD.2 P2.10 U9.24 U10.10
FSMC_A1: P2.9 U9.1 U10.11
FSMC_A2: P2.12 U9.2 U10.12
FSMC_A3: P2.11 U9.3 U10.13
FSMC_A4: P2.14 U9.4 U10.14
FSMC_A5: P2.13 U9.5 U10.15
FSMC_A6: P2.35 U9.23 U10.50
FSMC_A7: P2.38 U3.32 U9.22 U10.53
FSMC_A8: P2.37 U9.21 U10.54
FSMC_A9: P2.40 U9.20 U10.55
FSMC_A10: P2.39 U9.19 U10.56
FSMC_A11: P2.42 U9.18 U10.57
FSMC_A12: P3.38 U9.28 U10.87
FSMC_A13: P3.37 U9.27 U10.88
FSMC_A14: P3.36 U9.26 U10.89
FSMC_A15: P3.35 U9.25 U10.90
FSMC_A16: P3.41 U9.42 U10.80
FSMC_A17: P3.40 U9.43 U10.81
FSMC_A18: P3.39 U9.44 U10.82
FSMC_D0: 2.4'/2.8'LCD.6 P4.1 U3.18 U9.7 U10.85
FSMC_D1: 2.4'/2.8'LCD.7 P4.2 U3.17 U9.8 U10.86
FSMC_D2: 2.4'/2.8'LCD.8 P4.3 U3.16 U9.9 U10.114
FSMC_D3: 2.4'/2.8'LCD.9 P4.4 U3.14 U9.10 U10.115
FSMC_D4: 2.4'/2.8'LCD.10 P4.5 U3.13 U9.13 U10.58
FSMC_D5: 2.4'/2.8'LCD.11 P4.6 U3.12 U9.14 U10.59
FSMC_D6: 2.4'/2.8'LCD.12 P4.7 U3.11 U9.15 U10.60
FSMC_D7: 2.4'/2.8'LCD.13 P4.8 U3.10 U9.16 U10.63
FSMC_D8: 2.4'/2.8'LCD.14 P4.9 U3.31 U9.29 U10.64
FSMC_D9: 2.4'/2.8'LCD.15 P4.10 U3.29 U9.30 U10.65
FSMC_D10: 2.4'/2.8'LCD.16 P4.11 U3.28 U9.31 U10.66
FSMC_D11: 2.4'/2.8'LCD.17 P4.12 U3.27 U9.32 U10.67
FSMC_D12: 2.4'/2.8'LCD.18 P4.13 U3.26 U9.35 U10.68
FSMC_D13: 2.4'/2.8'LCD.19 P4.14 U3.25 U9.36 U10.77
FSMC_D14: 2.4'/2.8'LCD.20 P4.15 U3.24 U9.37 U10.78
FSMC_D15: 2.4'/2.8'LCD.21 P4.16 U3.22 U9.38 U10.79
FSMC_NBL0: P2.2 U9.39 U10.141
FSMC_NBL1: P2.1 U9.40 U10.142
FSMC_NE2: P3.14 R16.2 U3.37 U10.124
FSMC_NE3: P3.13 R42.2 U9.6 U10.125
FSMC_NE4: 2.4'/2.8'LCD.1 P3.11 U10.127
FSMC_NOE: 2.4'/2.8'LCD.4 P3.18 U3.35 U9.41 U10.118
FSMC_NWE: 2.4'/2.8'LCD.3 P3.17 U3.36 U9.17 U10.119
GBC_KEY: P2.25 P11.3 U10.40 U13.2
GBC_LED: JTAG.5 P3.24 R47.2 U10.110 U13.1
GBC_RX: P9.5 U13.3
GBC_TX: P9.6 U13.4
GBUF: U4.42
GND: 2.4'/2.8'LCD.22 2.4'/2.8'LCD.26 2.4'/2.8'LCD.27 BAT.2 BOOT.5 BOOT.6 C6.1 C7.1 C10.2 C11.1 C12.1 C13.1 C14.1 C15.1 C17.2 C18.2 C19.2 C20.2 C21.2 C22.2 C23.2 C24.1 C25.2 C26.1 C27.1 C28.1 C29.1 C30.1 C31.1 C32.2 C34.2 C35.2 C36.2 C37.2 C41.1 C42.1 C43.2 C46.2 C47.2 C48.2 C49.2 C51.2 C52.1 C53.1 C54.1 C55.2 C56.1 C57.1 C58.1 C59.2 C60.2 C61.1 C62.1 C63.1 C64.1 C65.2 C66.2 C67.1 C68.1 C69.1 C70.1 C71.2 C72.2 C73.2 C74.2 C75.2 C76.2 C77.2 C78.2 C79.2 C80.2 C81.2 C82.2 C83.2 C84.2 C85.2 C86.2 C87.2 C88.2 C89.2 C90.2 C92.2 C93.1 C94.2 C96.1 C97.2 C98.1 C99.1 C100.2 C101.2 C102.1 C103.2 C104.1 C105.2 C106.1 COM2.5 COM3.1 COM3.6 COM3.7 COM3.8 D2.1 D4.1 D5.1 D9.1 DC_IN.2 DC_IN.3 DS3.2 J1.8 J1.13 J1.14 JTAG.4 JTAG.6 JTAG.8 JTAG.10 JTAG.12 JTAG.14 JTAG.16 JTAG.18 JTAG.20 KEY_0.1 KEY_1.1 KEY_2.1 LINE_IN.3 LS1.1 P2.43 P3.44 P7.2 P11.4 PHONE.3 Q3.1 R3.2 R11.1 R13.1 R15.2 R21.2 R27.1 R35.2 R52.1 R58.2 R77.1 RESET.2 SD_CARD.3 SD_CARD.6 U1.4 U3.5 U3.6 U3.15 U3.33 U3.41 U3.45 U3.47 U3.48 U4.4 U4.16 U4.20 U4.21 U4.22 U4.35 U4.37 U4.40 U4.41 U4.47 U5.1 U6.2 U7.1 U8.1 U9.12 U9.34 U10.16 U10.30 U10.31 U10.38 U10.51 U10.61 U10.71 U10.83 U10.94 U10.107 U10.120 U10.130 U10.143 U11.15 U12.1 U13.5 U14.3 U14.4 U15.5 U16.2 U17.2 U17.8 U18.4 U19.1 U19.2 U19.3 U19.4 U19.7 USB_232.5 USB_SLAVE.5 VOUT1.1 VOUT1.3 VOUT1.5 VOUT2.1 VOUT2.3 VOUT2.5
IIC_SCL: P3.4 R78.1 U10.136 U19.6
IIC_SDA: P3.3 R79.1 U10.137 U19.5
IOVDD: C17.1 C18.1 C19.1 R14.1 R19.2 U4.6 U4.14 U4.19 U4.32
JOY_CLK: D9.2 P3.19 P7.4 R53.1 U10.117
JTCK: JTAG.9 P3.25 R52.2 U10.109
JTMS: JTAG.7 P3.26 R48.2 U10.105
KEY0: KEY_0.2 P2.6 U10.3
KEY1: KEY_1.2 P2.3 U10.2
KEY2: KEY_2.2 P2.4 U10.1
LCD_BL: 2.4'/2.8'LCD.23 P2.31 U10.46
LED0: DS1.2 P3.5 U10.135
LED1: DS2.2 P2.5 U10.4
LEDA: J1.10 R25.2
LEDB: J1.11 R24.2
LIGHT_SENSOR: P2.18 R75.1 U10.20
MP3_LEFT: C2.2 U4.46
MP3_RIGHT: C1.2 U4.39
NetBAT_1: BAT.1 D8.1
NetBEEP_2: BEEP.2 Q3.3
NetBOOT_3: BOOT.3 R49.2
NetBOOT_4: BOOT.4 R50.1
NetC1_1: C1.1 R2.2
NetC3_1: C3.1 R1.1 U1.1
NetC3_2: C3.2 PHONE.1
NetC5_1: C5.1 R5.1 U1.7
NetC5_2: C5.2 PHONE.2
NetC6_2: C6.2 R6.2 R7.1
NetC7_2: C7.2 P1.1 R7.2
NetC8_2: C8.2 C9.2 U2.7
NetC11_2: C11.2 U2.2
NetC12_2: C12.2 R8.1
NetC16_2: C16.2 R12.1
NetC26_2: C26.2 R20.2 U4.18 Y1.1
NetC27_2: C27.2 R20.1 U4.17 Y1.2
NetC28_2: C28.2 C29.2 C30.2 C31.2 L1.1 U3.23 U3.30 U3.42
NetC32_1: C32.1 C33.1 R22.2 R23.1
NetC33_2: C33.2 R26.2 R27.2
NetC37_1: C37.1 U4.44
NetC38_1: C38.1 C39.1 MIC.1 R23.2
NetC38_2: C38.2 C47.1 R28.2 U4.1
NetC39_2: C39.2 C40.1 MIC.2 R26.1
NetC40_2: C40.2 U4.2
NetC41_2: C41.2 U3.43 Y2.1
NetC42_2: C42.2 U3.44 Y2.2
NetC44_1: C44.1 LINE_IN.1
NetC44_2: C44.2 R28.1
NetC45_1: C45.1 LINE_IN.2
NetC45_2: C45.2 R29.1
NetC46_1: C46.1 R29.2 U4.48
NetC48_1: C48.1 C49.1 R30.1 R31.1 R32.1 R33.1
NetC50_1: C50.1 U6.1
NetC50_2: C50.2 D2.2 L2.1 U6.6
NetC57_2: C57.2 C58.2 D3.2 R36.1 U6.5
NetC61_2: C61.2 U7.4
NetC65_1: C65.1 U7.8 Y3.1
NetC66_1: C66.1 U7.7 Y3.2
NetC71_1: C71.1 U10.8 Y4.1
NetC72_1: C72.1 U10.9 Y4.2
NetC73_1: C73.1 D7.2 D8.2 U10.6
NetC74_1: C74.1 R43.1 U10.24 Y5.1
NetC75_1: C75.1 R43.2 U10.23 Y5.2
NetC91_1: C91.1 U11.3
NetC91_2: C91.2 U11.1
NetC93_2: C93.2 U11.2
NetC95_1: C95.1 U11.5
NetC95_2: C95.2 U11.4
NetC96_2: C96.2 U11.6
NetC98_2: C98.2 COM3.9 R54.2
NetCOM2_2: COM2.2 U11.14
NetCOM2_3: COM2.3 U11.13
NetCOM3_2: COM3.2 R53.2
NetD1_2: D1.2 U3.34
NetD3_1: D3.1 DC_IN.1
NetD6_2: D6.2 Q1.3 R38.1
NetDS1_1: DS1.1 R57.1
NetDS2_1: DS2.1 R62.1
NetDS3_1: DS3.1 R66.1
NetLS1_2: LS1.2 R74.1 R75.2
NetP10_5: P10.5 R72.1
NetP10_6: P10.6 R71.1
NetQ1_1: Q1.1 R40.1 U7.14
NetQ1_2: Q1.2 R39.2
NetQ2_2: Q2.2 R40.2
NetQ2_3: Q2.3 R41.1
NetQ3_2: Q3.2 R76.1 R77.2
NetR1_2: R1.2 R2.1 U1.2
NetR4_1: R4.1 R5.2 U1.6
NetR8_2: R8.2 U2.3
NetR12_2: R12.2 U2.4
NetR15_1: R15.1 U3.1
NetR17_1: R17.1 U3.21
NetR18_1: R18.1 U3.20
NetR19_1: R19.1 U4.26
NetR21_1: R21.1 U4.33 U4.34
NetR24_1: R24.1 U3.38
NetR25_1: R25.1 U3.39
NetR35_1: R35.1 R37.2 U6.3
NetR36_2: R36.2 U6.4
NetR39_1: R39.1 U7.13
NetR55_2: R55.2 U12.8
NetR56_1: R56.1 U11.9
NetR58_1: R58.1 R64.1 RS1.1 U15.7
NetR60_1: R60.1 R64.2 RS1.2 U15.6
NetR69_1: R69.1 RS2.1 U17.7
NetR69_2: R69.2 RS2.2 U17.6
NetR71_2: R71.2 USB_SLAVE.3
NetR72_2: R72.2 R73.2 USB_SLAVE.4
NetSP+_1: SP+.1 U2.5
NetSP-_1: SP-.1 U2.8
NFR_CE: P3.32 U10.93 U12.3
NRF_CS: P3.33 U10.92 U12.4
NRF_MISO: U12.7
NRF_MOSI: U12.6
NRF_SCK: U12.5
OV_D0: P2.19 P7.8 U10.26
OV_D1: P2.22 P7.9 U10.27
OV_D2: P2.21 P7.10 U10.28
OV_D3: P2.24 P7.11 U10.29
OV_D4: P2.29 P7.12 U10.44
OV_D5: P2.32 P7.13 U10.45
OV_D6: P3.31 P7.14 U10.96
OV_D7: P3.30 P7.15 U10.97
OV_SDA: P3.10 P7.6 U10.128
OV_VSYNC: P3.27 P7.17 R6.1 U10.100
PA0: KEY_UP.2 P2.26 U10.34
PA1: P2.23 P11.2 U10.35
PA2: P8.3 U10.36
PA3: P8.4 U10.37
PA5: P2.28 U4.28 U10.41
PA6: P2.27 U4.30 U10.42
PA7: P2.30 U4.29 U10.43
PA9: P5.3 U10.101
PA10: P5.1 U10.102
PA11: P10.4 U10.103
PA12: P10.3 U10.104
PB1: 2.4'/2.8'LCD.34 P2.34 U10.47
PB9: P3.1 R70.1 U10.140 U16.1
PB10: P9.3 U10.69
PB11: P9.4 U10.70
PB13: P2.41 U10.74 U18.6
PB14: P3.43 U10.75 U18.2
PB15: P3.42 U10.76 U18.5
PC8: P3.29 R67.1 SD_CARD.7 U10.98
PC9: P3.28 R68.1 SD_CARD.8 U10.99
PC10: P3.23 R59.1 SD_CARD.9 U10.111
PC11: P3.22 R61.1 SD_CARD.1 U10.112
PC12: P3.21 SD_CARD.5 U10.113
PC13: P2.7 U4.8 U10.7
PD2: P3.20 R63.1 SD_CARD.2 U10.116
PE6: P2.8 U4.3 U10.5
PF6: P2.16 U4.13 U10.18
PF7: P2.15 U4.23 U10.19
PF9: 2.4'/2.8'LCD.30 P2.17 U10.21
PF10: 2.4'/2.8'LCD.31 P2.20 U10.22
PF11: 2.4'/2.8'LCD.33 P2.36 U10.49
PWM_AUDIO: C4.2 P1.2
RESET: 2.4'/2.8'LCD.5 C76.1 D6.1 JTAG.15 R44.2 RESET.1 U10.25
RS485_RX: P8.5 U15.4
RS485_TX: P8.6 U15.1
RXD: P5.4 U7.3
SPK_CTRL: R3.1 U2.1 U4.36
SPK_IN: C2.1 C4.1 C16.1 R4.2
TPAD: P11.1 R80.1
TPRX+: J1.1 R30.2 U3.3
TPRX-: J1.2 R31.2 U3.4
TPTX+: J1.3 R32.2 U3.7
TPTX-: J1.6 R33.2 U3.8
TXD: P5.2 U7.2
U2_RX: P8.1 U11.11
U2_TX: P8.2 U11.12
U3_232RX: K2.6 U11.8
U3_232TX: K2.5 U11.7
U3_RX: K2.2 P9.1 U11.10
U3_TX: K2.1 P9.2 R56.2
VBTN: C55.1 C56.2 F1.2 K1.3 L2.2 R37.1
VCC2.5: C24.2 C25.1 C43.1 J1.4 J1.5 U3.2 U3.9
VCC3.3: 2.4'/2.8'LCD.24 2.4'/2.8'LCD.25 BEEP.1 BOOT.1 BOOT.2 C51.1 C52.2 C67.2 C68.2 C69.2 C79.1 C80.1 C81.1 C82.1 C83.1 C84.1 C85.1 C86.1 C87.1 C88.1 C89.1 C92.1 C94.1 C97.1 C100.1 C101.1 C102.2 C104.2 C105.1 C106.2 D5.2 D7.1 J1.9 J1.12 JTAG.1 JTAG.2 KEY_UP.1 L1.2 P7.1 Q2.1 R14.2 R16.1 R17.2 R18.2 R34.2 R38.2 R42.1 R44.1 R45.2 R46.1 R47.1 R48.1 R51.1 R57.2 R59.2 R60.2 R61.2 R62.2 R63.2 R65.2 R66.2 R67.2 R68.2 R70.2 R73.1 R74.2 R78.2 R79.2 R80.2 SD_CARD.4 U5.2 U5.4 U9.11 U9.33 U10.17 U10.39 U10.52 U10.62 U10.72 U10.84 U10.95 U10.108 U10.121 U10.131 U10.144 U11.16 U12.2 U14.1 U15.8 U16.3 U18.3 U18.7 U18.8 U19.8 VOUT1.2 VOUT1.4 VOUT1.6
VCC5: 2.4'/2.8'LCD.28 C8.1 C9.1 C53.2 C59.1 C60.1 C64.2 C70.2 C99.2 C103.1 D4.2 K1.2 R10.1 R54.1 U2.6 U5.3 U7.16 U8.3 U13.6 U17.3 VOUT2.2 VOUT2.4 VOUT2.6
VDDA: C77.1 C78.1 P6.2 R45.1 U10.33
VDDAMP: C10.1 C15.2 R9.1 R10.2 U1.8
VREF+: C90.1 P6.1 U10.32
VUSB: F1.1 USB_232.1 USB_SLAVE.1
pads on no net: 2.4'/2.8'LCD. 2.4'/2.8'LCD.32 BAT.0 COM2.0 COM2.1 COM2.4 COM2.6 COM2.7 COM2.8 COM2.9 COM3.0 COM3.5 J1.7 JTAG.11 JTAG.17 JTAG.19 K1.1 K1.4 K1.5 K1.6 LINE_IN.0 PHONE.0 SD_CARD.10 SD_CARD.11 SD_CARD.12 U3.19 U3.46 U4.9 U4.10 U4.11 U4.12 U4.15 U4.25 U4.27 U7.9 U7.10 U7.11 U7.12 U7.15 U10.106 U17.5 USB_232.4 USB_232.6 USB_232.7 USB_232.8 USB_232.9 USB_232.MH1 USB_232.MH2 USB_SLAVE.2 USB_SLAVE.6 USB_SLAVE.7 USB_SLAVE.8 USB_SLAVE.9 USB_SLAVE.MH1 USB_SLAVE.MH2

## Keep-outs
Keep-Out Layer:
  the board outline again, w0.254

## Text inside footprints (layer, text, board x,y; h text height)
2.4'/2.8'LCD: Top Overlay "D14" at 456.617,144.568 h0.9; Top Overlay "RS" at 434.117,144.568 h0.9; Top Overlay "CS" at 434.084,138.182 h0.9; Top Overlay "WR" at 436.624,138.182 h0.9; Top Overlay "RST" at 438.783,138.182 h0.9; Top Overlay "D1" at 441.831,138.182 h0.9; Top Overlay "D2" at 441.742,144.568 h0.9; Top Overlay "D3" at 444.244,138.182 h0.9; Top Overlay "D4" at 444.242,144.568 h0.9; Top Overlay "D5" at 446.784,138.182 h0.9; Top Overlay "D6" at 446.867,144.568 h0.9; Top Overlay "D8" at 448.992,144.568 h0.9; Top Overlay "D9" at 451.737,138.182 h0.9; Top Overlay "D12" at 454.117,144.568 h0.9; Top Overlay "D15" at 459.23,138.182 h0.9; Top Overlay "VDD" at 464.183,138.182 h0.9; Top Overlay "VDD" at 466.742,144.568 h0.9; Top Overlay "GND" at 464.117,144.568 h0.9; Top Overlay "VDD" at 461.617,144.568 h0.9; Top Overlay "D10" at 451.492,144.568 h0.9; Top Overlay "D0" at 439.242,144.568 h0.9; Top Overlay "RD" at 436.617,144.568 h0.9; Top Overlay "GND" at 459.117,144.568 h0.9; Top Overlay "GND" at 466.596,138.182 h0.9; Top Overlay "D11" at 454.15,138.182 h0.9; Top Overlay "PEN" at 471.803,138.182 h0.9; Top Overlay "CLK" at 474.242,144.568 h0.9; Top Overlay "MOSI" at 468.992,144.568 h0.9; Top Overlay "MO" at 472.242,144.568 h0.9; Top Overlay "TCS" at 474.343,138.182 h0.9; Top Overlay "MISO" at 468.882,138.182 h0.9; Top Overlay "BL" at 462.151,138.182 h0.9; Top Overlay "D14" at 456.619,144.562 h0.9; Top Overlay "RS" at 434.119,144.562 h0.9; Top Overlay "CS" at 434.086,138.176 h0.9; Top Overlay "WR" at 436.626,138.176 h0.9; Top Overlay "RST" at 438.785,138.176 h0.9; Top Overlay "D1" at 441.833,138.176 h0.9; Top Overlay "D2" at 441.744,144.562 h0.9; Top Overlay "D3" at 444.246,138.176 h0.9; Top Overlay "D4" at 444.244,144.562 h0.9; Top Overlay "D5" at 446.786,138.176 h0.9; Top Overlay "D6" at 446.869,144.562 h0.9; Top Overlay "D8" at 448.994,144.562 h0.9; Top Overlay "D9" at 451.739,138.176 h0.9; Top Overlay "D13" at 456.619,138.166 h0.9; Top Overlay "D12" at 454.119,144.562 h0.9; Top Overlay "D15" at 459.232,138.176 h0.9; Top Overlay "VDD" at 464.185,138.176 h0.9; Top Overlay "VDD" at 466.744,144.562 h0.9; Top Overlay "GND" at 464.119,144.562 h0.9; Top Overlay "VDD" at 461.619,144.562 h0.9; Top Overlay "D10" at 451.494,144.562 h0.9; Top Overlay "D0" at 439.244,144.562 h0.9; Top Overlay "RD" at 436.619,144.562 h0.9; Top Overlay "GND" at 459.119,144.562 h0.9; Top Overlay "GND" at 466.598,138.176 h0.9; Top Overlay "D11" at 454.152,138.176 h0.9; Top Overlay "PEN" at 471.805,138.176 h0.9; Top Overlay "CLK" at 474.244,144.562 h0.9; Top Overlay "MOSI" at 468.994,144.562 h0.9; Top Overlay "MO" at 472.244,144.562 h0.9; Top Overlay "TCS" at 474.345,138.176 h0.9; Top Overlay "MISO" at 468.884,138.176 h0.9; Top Overlay "BL" at 462.153,138.176 h0.9; Top Overlay "D7" at 448.945,138.176 h0.9
U5: Top Overlay "1" at 138.863,74.016 h0.9 r90
U8: Top Overlay "1" at 137.085,61.062 h0.9 r90